# Altium PCB U_I_Meter_Bottom.PcbDoc
Units mm, origin at the board's own origin, x right, y up, seen from the top; angles counter-clockwise.
Board outline 67 x 84 mm, 2 copper layers (Top Layer, Bottom Layer), stack 1.071 mm thick; 37 components, 15 nets, 92 pads, 11 vias.
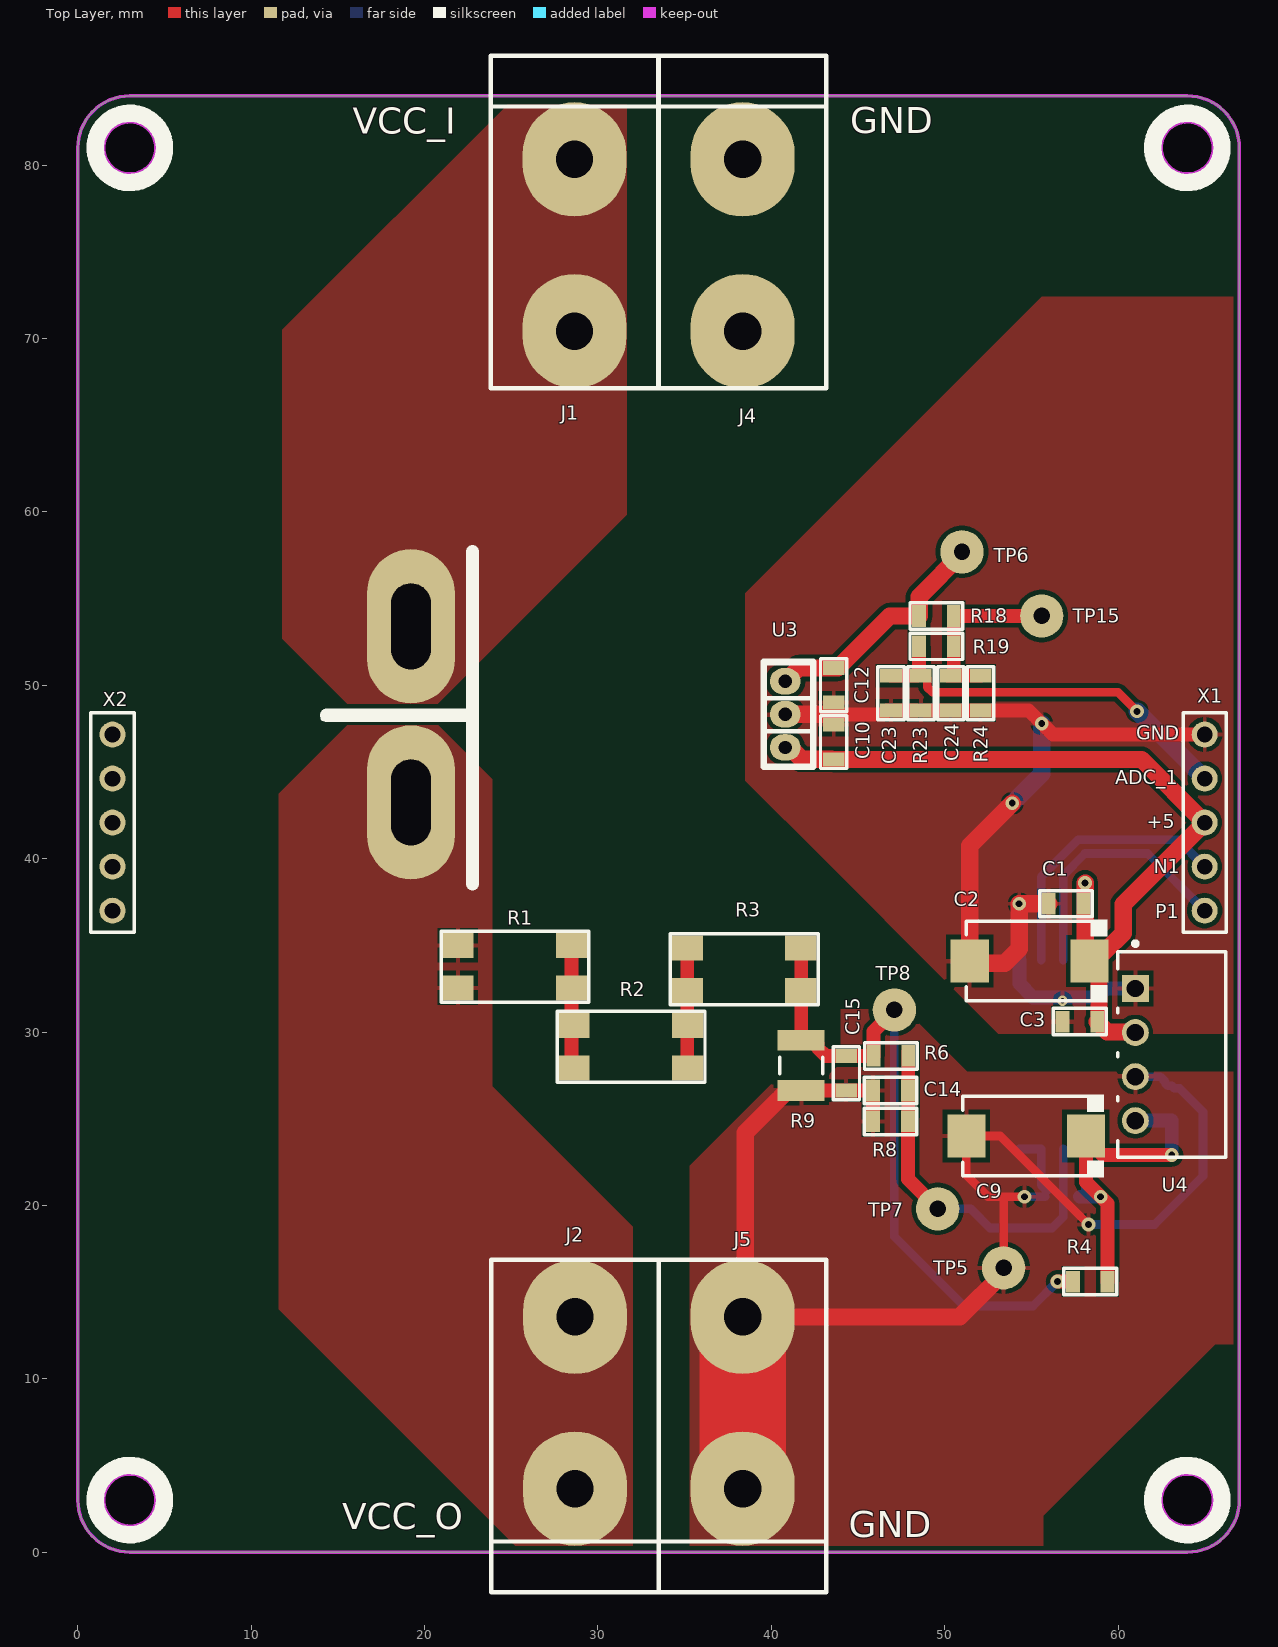
[diagram p0: Top Layer view]
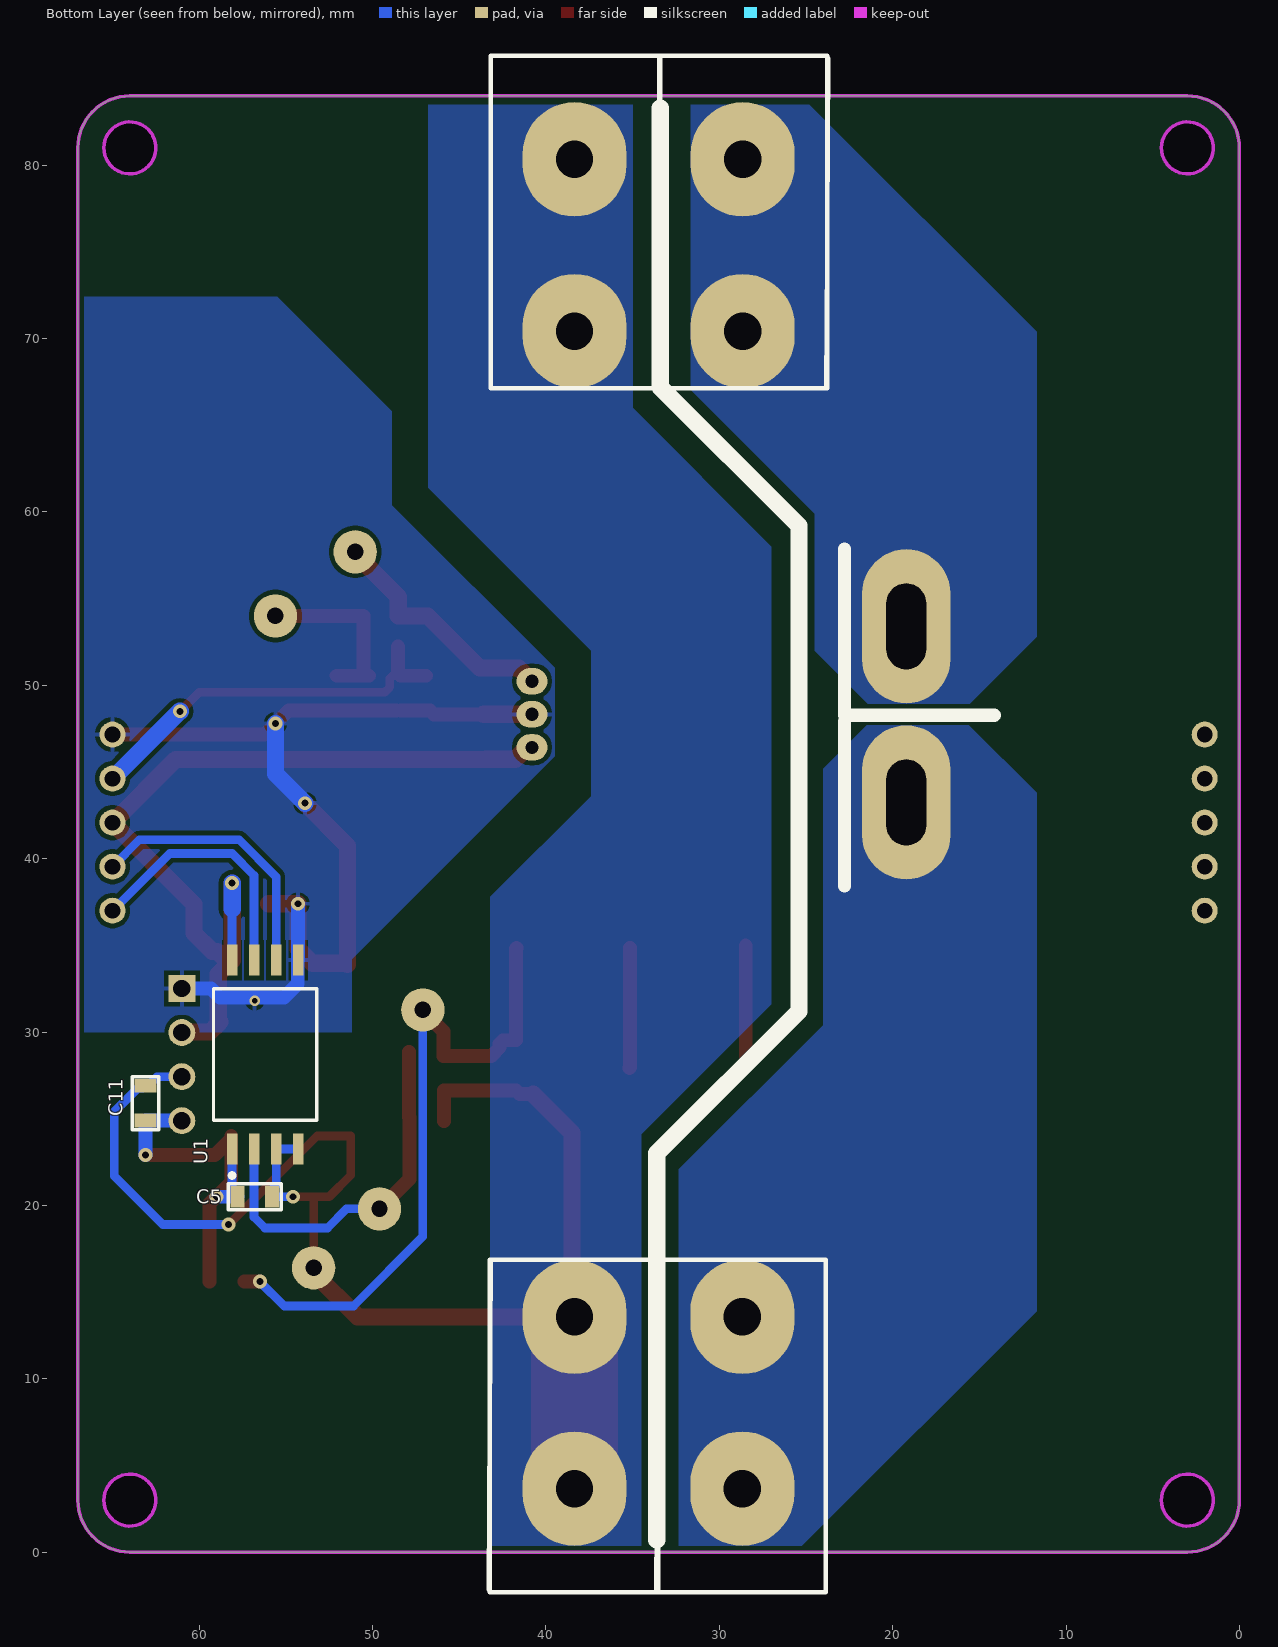
[diagram p1: Bottom Layer view, seen from below]
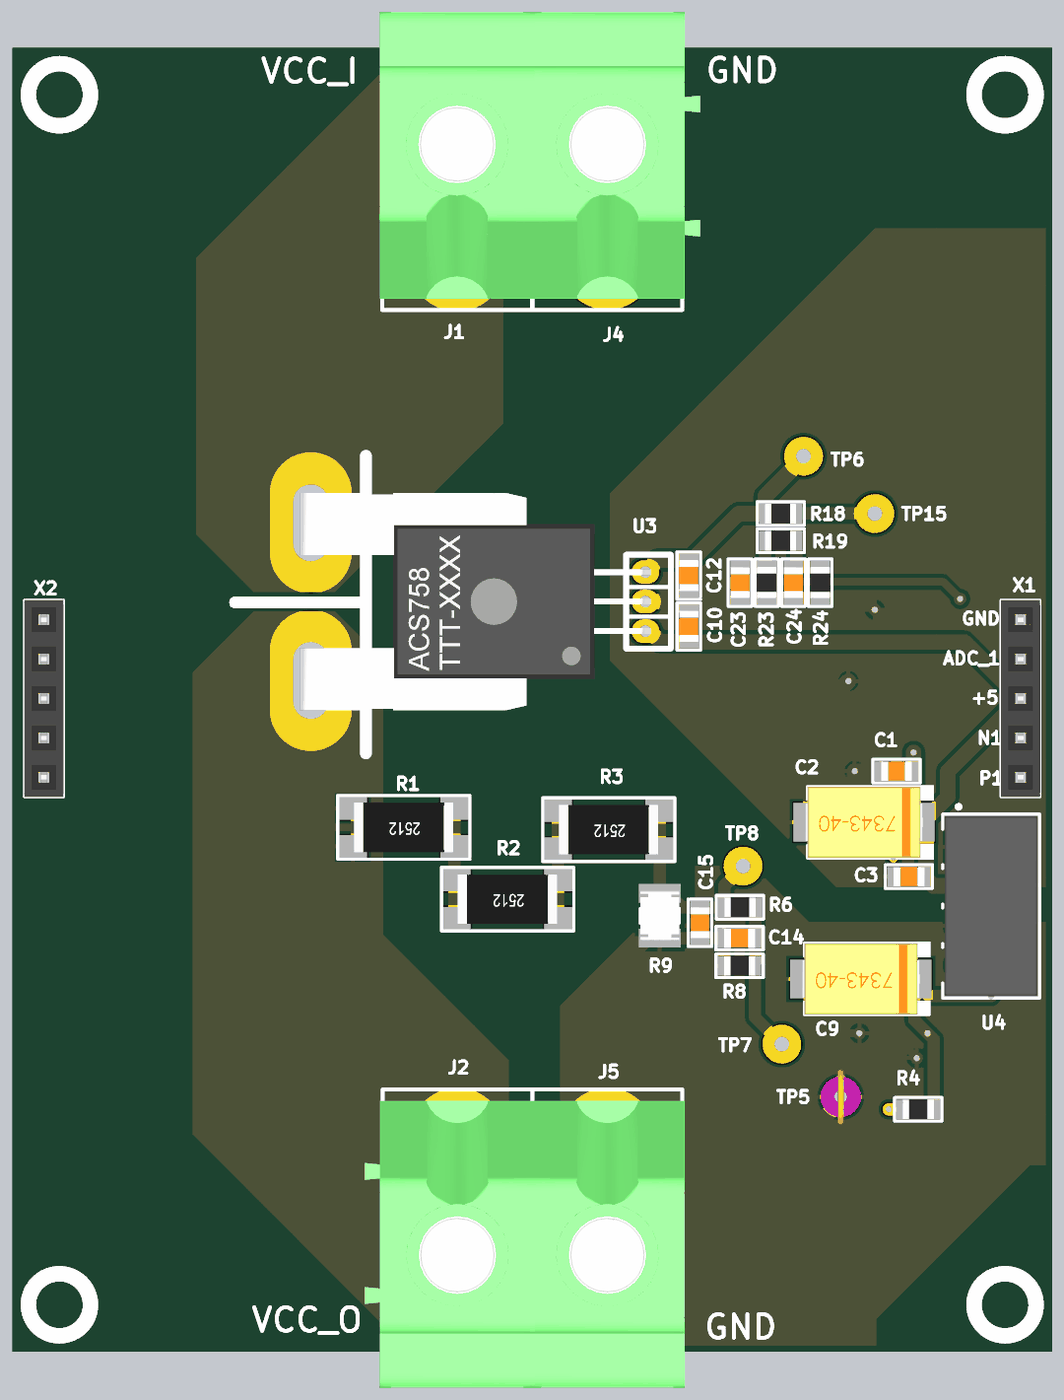
[diagram p2: 3D render of the assembled board from above, using the file's embedded part models]
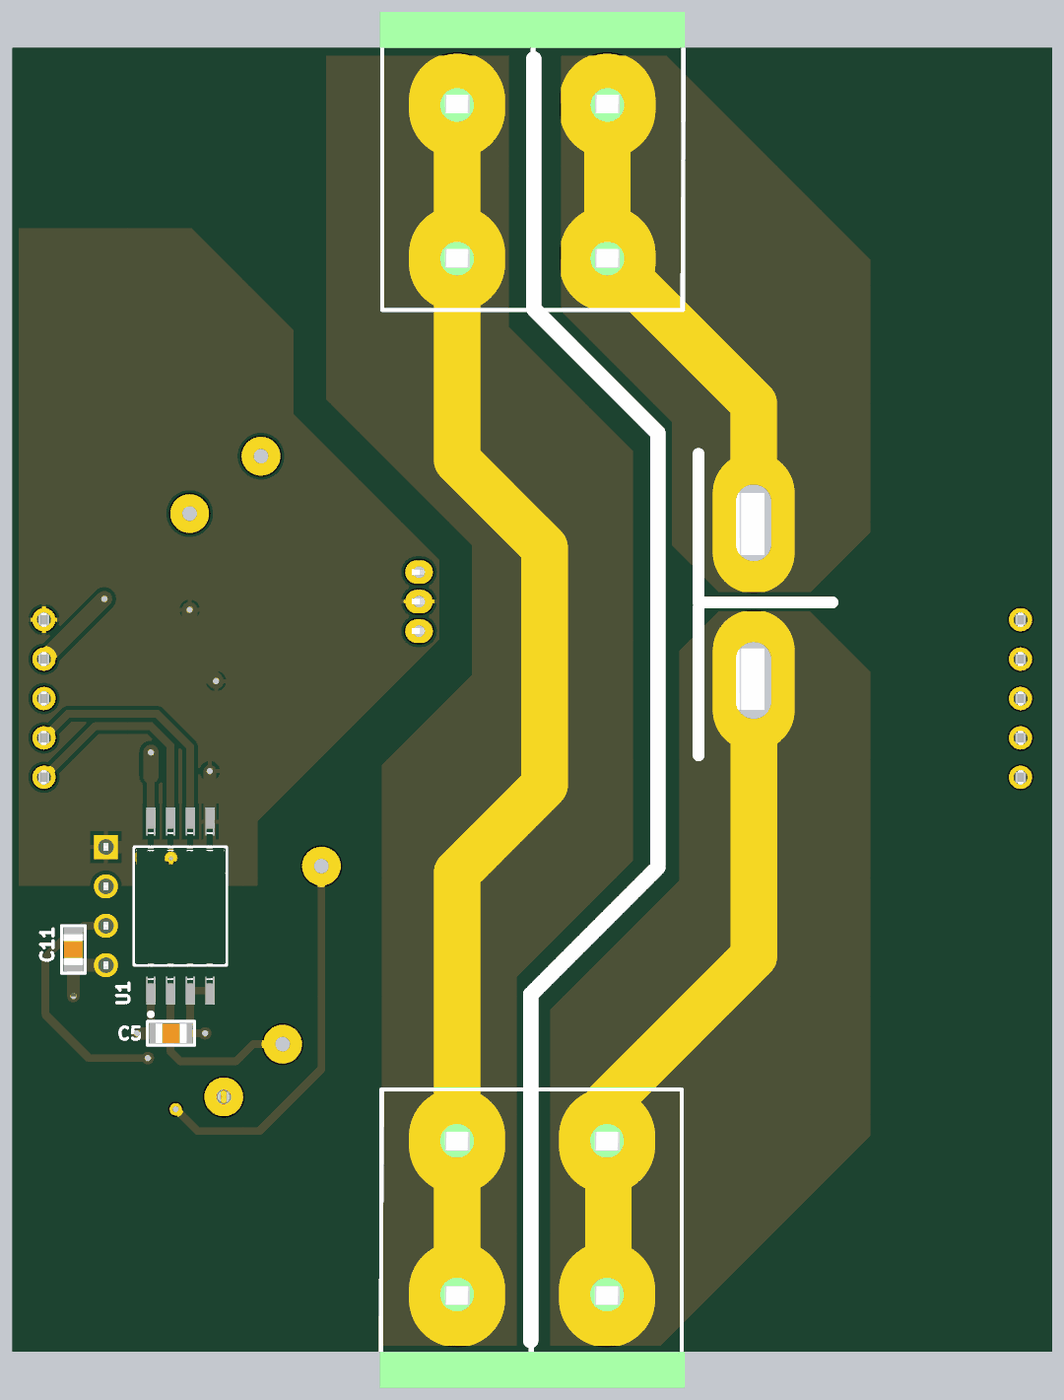
[diagram p3: 3D render of the assembled board from below, using the file's embedded part models]

## Layer stack, top to bottom
Top Solder: solder mask 0.0102, Solder Resist, Dk 3.5
Top Layer: signal copper 0.0356
Dielectric 1: dielectric 1, FR-4, Dk 4.8
Bottom Layer: signal copper 0.0356
Bottom Solder: solder mask 0.0102, Solder Resist, Dk 3.5

## Board outline
3,0 cw(c3,3) 0,3 0,81 cw(c3,81) 3,84 64,84 cw(c64,81) 67,81 67,3 cw(c64,3) 64,0
cut-out: 62.5,3 ccw(c64,3) 64,1.5 ccw(c64,3) 65.5,3 ccw(c64,3) 64,4.5 ccw(c64,3)
cut-out: 3,1.5 cw(c3,3) 1.5,3 cw(c3,3) 3,4.5 cw(c3,3) 4.5,3 cw(c3,3)
cut-out: 3,79.5 cw(c3,81) 1.5,81 cw(c3,81) 3,82.5 cw(c3,81) 4.5,81 cw(c3,81)
cut-out: 64,79.5 cw(c64,81) 62.5,81 cw(c64,81) 64,82.5 cw(c64,81) 65.5,81 cw(c64,81)

## Design rules (kind name [scope] priority, off if disabled: settings)
Clearance [All] p1: gap=0.254 ignorepadtopadclearanceinfootprint=FALSE
ComponentClearance [All] p1: gap=-1 collisioncheckmode=3 verticalgap=0 showdistances=FALSE
Height [All] p1: minheight=-1 maxheight=50 prefheight=12.7
PolygonConnect [All] p1: connectstyle=Relief reliefconductorwidth=0.254 reliefentries=4 polygonreliefangle="90 Angle" airgapwidth=0.254
RoutingVias [All] p1: holewidth=0.711 width=1.27 viastyle="Through Hole" minholewidth=0.711 minwidth=1.27 maxholewidth=0.711 maxwidth=1.27
SolderMaskExpansion [All] p1: expansion=0.102 istentingtop=FALSE
Width [All] p1: maxlimit=10 minlimit=0.254 preferedwidth=0.254 minimp=50.000000 maximp=50.000000 favimp=50.000000
28 further rules are at their usual default settings.

## Components (designator, comment, footprint, x,y, rotation, side; value= is the part's Value field where it differs from the comment)
C1 "0.1uF" CAP-0805 57,37.4 r180 top
C2 "47uF_16V" CAP-TAN-D 54.9,34.1 r180 top
C3 "0.1uF" CAP-0805 57.8,30.6 r180 top
C5 "0.1uF" CAP-0805 56.8,20.5 r0 bottom
C9 "100uF_16V" CAP-TAN-D 54.7,24 r180 top
C10 "1uF" CAP-0805 43.6,46.725 r270 top
C11 "0.1uF" CAP-0805 63.1,25.9 r90 bottom
C12 "0.1uF" CAP-0805 43.6,50 r90 top
C14 "0.33uF" CAP-0805 46.875,26.625 r0 top
C15 "0.1uF" CAP-0805 44.325,27.625 r90 top
C23 "0.47uF" CAP-0805 46.9,49.55 r90 top
C24 "220pF" CAP-0805 50.35,49.55 r90 top
J1 "MG_136_HT" Conn_MEIGAN_MG136HT 28.65,77.8 r180 top
J2 "MG_136_HT" Conn_MEIGAN_MG136HT 28.675,6.2 r0 top
J4 "MG_136_HT" Conn_MEIGAN_MG136HT 38.35,77.8 r180 top
J5 "MG_136_HT" Conn_MEIGAN_MG136HT 38.35,6.2 r0 top
R1 "" RES-2512 25.2,33.775 r180 top
R2 "" RES-2512 31.9,29.15 r180 top
R3 "" RES-2512 38.425,33.625 r180 top
R4 "" RES-0805 58.4,15.6 r0 top
R6 "1K" RES-0805 46.9,28.625 r0 top
R8 "1M" RES-0805 46.875,24.85 r0 top
R9 "RES_1210" RES_SMD_1210_IPC_B 41.725,28.075 r90 top
R18 "10K" RES-0805 49.525,54 r0 top
R19 "1K" RES-0805 49.525,52.25 r180 top
R23 "43K" RES-0805 48.625,49.55 r90 top
R24 "36K" RES-0805 52.075,49.55 r90 top
TP5 "Test_Point_PCB" Pin_Test_Point(Pink) 53.4,16.4 r0 top
TP6 "Test_Point_PCB" Test_Point 51,57.7 r0 top
TP7 "Test_Point_PCB" Test_Point 49.6,19.8 r0 top
TP8 "Test_Point_PCB" Test_Point 47.1,31.275 r0 top
TP15 "Test_Point_PCB" Test_Point 55.6,54 r90 top
U1 "AMC1311" FP-DWV0008A-MFG 56.2,28.7 r90 bottom
U3 "ACS758" ACS758-100 31.025,48.325 r90 top
U4 "B0505S-1W" B0505S-1W 63.1,28.7 r270 top locked
X1 "CONN-5-PIN" CONN-PLS-5-2.54mm 65,37 r90 top locked
X2 "CONN-5-PIN" CONN-PLS-5-2.54mm 2,37 r90 top locked

## Footprints (in the part's own frame and the unit in brackets; to place one, negate y for a bottom-side part, rotate by r counter-clockwise, add the part's x,y. Pads: shape width x height; smd on the part's side, far side on the other; paste and mask are expansions set on the pad)
ACS758-100 [mil]
  oval 60x70 hole 30: 1(-75,-385) 2(0,-385) 3(75,-385)
  oval 350x200 hole 90 slot 195 at 0 deg: 4(200,465) 5(-200,465)
  silkscreen extent -385,-449 370,665, body extent -276,-404 276,492, height 280
B0505S-1W [mm]
  rect 1.55x1.55 hole 1 paste-2539.97 mask+0: 1(-3.81,-2.1)
  round 1.55 hole 1 paste-2539.97 mask+0: 2(-1.27,-2.1) 3(1.27,-2.1) 4(3.81,-2.1)
  silkscreen extent -6.52,-3.13 5.92,3.13, body extent -6.02,-3.22 6.02,3.22, height 0.25
CAP-0805 [mm]
  rect 0.8x1.25 smd mask+0.015: 1(-1,0) 2(1,0)
  silkscreen extent -1.52,-0.76 1.52,0.76, body extent -1,-0.62 1,0.63, height 0.8
CAP-TAN-D [mm]
  rect 2.2x2.5 smd: 1(-3.45,0) 2(3.45,0)
  silkscreen extent -4.5,-2.4 3.65,2.4, body extent -3.8,-2.3 3.8,2.3, height 4
CONN-PLS-5-2.54mm [mm]
  round 1.5 hole 0.9: 1(0,0) 2(2.54,0) 3(5.08,0) 4(7.62,0) 5(10.16,0)
  silkscreen extent -1.25,-1.25 11.41,1.25, body extent -1.27,-1.27 11.43,1.27, height 8.4
Conn_MEIGAN_MG136HT [mm]
  oval 6x6.6 hole 2.159: 1(0,7.366) 1(0,-2.54)
  silkscreen extent -4.83,-8.51 4.83,10.67, body extent -6,-8.55 5,9.95, height 30.95
FP-DWV0008A-MFG [mm]
  rect 1.8x0.6 smd paste+0 mask+0: 1(-5.45,1.905) 2(-5.45,0.635) 3(-5.45,-0.635) 4(-5.45,-1.905) 5(5.45,-1.905) 6(5.45,-0.635) 7(5.45,0.635) 8(5.45,1.905)
  silkscreen extent -7.1,-2.98 3.8,2.98, body extent -5.75,-2.93 5.75,2.93, height 2.8
Pin_Test_Point(Pink) [mm]
  round 2.5 hole 0.95: 1(0,0)
  body extent -1.3,-1.78 1.3,1.78, height 6.93
RES-0805 [mm]
  rect 0.8x1.25 smd mask+0.015: 1(-1,0) 2(1,0)
  silkscreen extent -1.52,-0.76 1.52,0.76, body extent -1,-0.62 1,0.63, height 0.6
RES-2512 [mm]
  rect 1.8x1.45 smd: 1(-3.275,-1.225) 1(-3.275,1.225) 2(3.275,-1.225) 2(3.275,1.225)
  silkscreen extent -4.28,-2.05 4.25,2.05, body extent -3.2,-1.6 3.2,1.6, height 0.6
RES_SMD_1210_IPC_B [mm]
  rect 1.205x2.706 smd paste+0 mask+0: 1(-1.451,0) 2(1.451,0)
  silkscreen extent -0.47,-1.25 0.47,1.25, body extent -2.3,-1.6 2.3,1.6, height 0.25
Test_Point [mm]
  round 2.5 hole 0.95: 1(0,0)

## Part data
C1 C3 C5 C10 C11 C12 C14 C15 C23 C24: library part CAP-NON-POLAR
C2: library part CAP-POLAR
C9: library part CAP_POL_SMD
J1 J2 J4 J5: library part Connector_MEIGAN_MG136HT
R1 R2 R3 R4 R6 R8 R18 R23 R24: library part RES-CONST
R19: library part RES-CONST, "10K"
TP5 TP6 TP7 TP8 TP15: library part TP_PCB?, "Test_Point"

## Via types
v1: diameter 0.8, hole 0.4, Top Layer to Bottom Layer, tented both sides, 9 vias
v2: diameter 0.6, hole 0.3, Top Layer to Bottom Layer, 1 vias
v3: diameter 0.8, hole 0.4, Top Layer to Bottom Layer, 1 vias

## Nets (pads, with @x,y where several pads share a name; then routed paths per layer and width w, separated by ;. In a path a pad name is that pad's centre, name@x,y a point inside that pad or via, vN(x,y) a via of type N, cw(c..) or ccw(c..) an arc to the next point about the centre after c; other vN are vias at no path point)
+5: C1.1 C2.1 C3.1 C10.2 U1.8 U3.1 U4.2 X1.3 | length 52.3
  Top Layer w1: U3.1 41.071,46.42 41.759,45.732 C10.2@43.475,45.732 ; C10.2 61.355,45.725 X1.3 60.3,37.38 60.3,35.7 59.25,34.65 58.95,34.65 58.35,34.05 C2.1@58.35,33.9 ; v1(58.1,38.6) 58.1,37.4 58.1,34.15 C2.1@58.35,33.9 ; C3.1 58.9,30.5 58.9,30.475 59.375,30 60.97,30 U4.2 ; C3.1@58.9,30.6 58.9,33.35 C2.1@58.35,33.9
  Bottom Layer w0.5: 58.1,37.1 58.105,37.095 U1.8
  Bottom Layer w1: 58.1,37.1 v1(58.1,38.6) ; U4.2@60.93,29.9 U4.2
GND: C5.1 C9.2 C11.2 C14.1 C15.1 J4.1 J5.1 R8.1 R9.1 TP5.1 U1.3 U1.4 U4.3 | length 85
  Top Layer w0.5: TP5.1@53.4,16.1 TP5.1 ; TP5.1@53.4,16.7 53.4,20.5 ; v1(54.6,20.5) 53.4,20.5 ; v1(58.3,18.9) 53.2,24 C9.2 51.25,21.75 52.5,20.5 53.4,20.5
  Top Layer w0.8: J5.1@38.35,16.131 J5.1@38.5,16.281 ; R9.1@40.722,26.422 41.523,26.422 R9.1 C14.1 R8.1
  Top Layer w1: J5.1@38.35,13.566 50.866,13.566 TP5.1@53.4,16.1 ; J5.1@38.5,16.281 38.5,24.2 R9.1@40.722,26.422
  Top Layer w5: J5.1@38.35,3.66 J5.1@38.35,13.566
  Bottom Layer w0.5: U1.4 U1.3 55.565,21.168 55.858,20.875 C5.1@55.95,20.875 ; v1(54.6,20.5) C5.1 ; v1(58.3,18.9) 62.1,18.9 64.9,21.7 64.9,25.4 63.55,26.75 63.25,26.75 C11.2 62.875,26.9 62.725,27.05 62.725,27.137 62.432,27.43 U4.3
GND_III: C1.2 C2.2 C3.2 C10.1 C12.1 C23.1 C24.1 R23.1 R24.1 U1.5 U3.2 U4.1 X1.5 | length 59.6
  Top Layer w0.8: 43.6,48.325 46.45,48.325 46.675,48.55 R23.1@48.35,48.55 ; R23.1 C24.1 R24.1 54.85,48.55 56.24,47.16 X1.5
  Top Layer w1: U3.2 43.6,48.325 ; v1(53.9,43.2) 51.45,40.75 51.45,33.9 51.514,33.964 53.464,33.964 54.3,34.8 v1(54.3,37.4) C1.2
  Bottom Layer w0.8: v1(54.3,37.4) 54.295,37.395 U1.5 54.312,34.133 54.312,32.788 55.1,32 58.8,32 59.31,32.51 U4.1
  Bottom Layer w1: v1(53.9,43.2) 55.6,44.9 v1(55.6,47.8)
  other v2: 56.8,31.8
NetC12_2: C12.2 R18.1 TP6.1 U3.3 | length 14.1
  Top Layer w1: U3.3 41.574,51 C12.2 43.825,51 46.825,54 R18.1 48.525,55.113 TP6.1@51.113,57.7
NetC14_2: C14.2 R6.2 R8.2 TP7.1 U1.2 | length 21.4
  Top Layer w0.8: R8.2 47.875,21.525 TP7.1 ; R8.2@47.875,25.075 47.9,25.1 47.9,26.625 R6.2 R6.2@47.9,28.85
  Bottom Layer w0.5: TP7.1 51.5,19.8 52.6,18.7 56.2,18.7 56.835,19.335 U1.2
NetC15_2: C15.2 R3.1 R4.1 R6.1 R9.2 TP8.1 | length 38.8
  Top Layer w0.8: R3.1@41.7,34.85 41.725,34.825 R9.2 42.476,29.526 42.678,29.323 42.678,29.094 43.147,28.625 C15.2 R6.1 45.9,30.021 47.1,31.221 TP8.1 ; v3(56.5,15.6) R4.1
  Bottom Layer w0.5: TP8.1 47.1,18.2 51.1,14.2 55.1,14.2 v3(56.5,15.6)
NetC23_2: C23.2 R19.2 R23.2 X1.4 | length 22.3
  Top Layer w0.5: R23.2@48.4,50.55 48.85,50.55 49,50.4 49,49.893 49.293,49.6 60,49.6 v1(61.1,48.5)
  Top Layer w0.8: C23.2 R23.2@48.4,50.55 ; R23.2@48.525,50.85 R19.2
  Bottom Layer w1: v1(61.1,48.5) 61.12,48.5 X1.4
NetC24_2: C24.2 R18.2 R19.1 R24.2 TP15.1 | length 10.5
  Top Layer w0.8: C24.2@50.189,50.55 C24.2 C24.2@50.375,50.55 ; R24.2 C24.2@50.375,50.55 ; TP15.1 R18.2 R19.1 50.525,50.7 C24.2@50.375,50.55
NetJ1_1: J1.1 U3.4
NetJ2_1: J2.1 R1.2 U3.5
NetR1_1: R1.1 R2.2 | length 7.1
  Top Layer w0.8: R1.1@28.475,35 28.475,32.55 28.475,28.075 R2.2@28.625,27.925
NetR2_1: R2.1 R3.2 | length 6.9
  Top Layer w0.8: R3.2@35.15,34.85 35.15,32.4 35.15,27.95 R2.1@35.175,27.925
NetU1_6: U1.6 X1.2 | length 15.8
  Bottom Layer w0.5: U1.6 55.565,38.965 57.7,41.1 63.44,41.1 X1.2
NetU1_7: U1.7 X1.1 | length 14.9
  Bottom Layer w0.5: U1.7 56.835,39.035 58.1,40.3 61.7,40.3 X1.1
VCC_ISO: C5.2 C9.1 C11.1 R4.2 U1.1 U4.4 | length 22.2
  Top Layer w0.8: C9.1 C9.1@58.15,23.85 ; R4.2 59.4,20.1 58.15,21.35 C9.1@58.15,23.85 ; v1(63.1,22.9) 59.1,22.9 C9.1@58.15,23.85
  Bottom Layer w0.5: C5.2@58.105,20.515 U1.1
  Bottom Layer w0.8: C5.2 v1(59,20.5) ; U4.4@61.054,24.89 62.865,24.89 62.875,24.9 C11.1 v1(63.1,22.9)
pads on no net: X2.1 X2.2 X2.3 X2.4 X2.5

## Polygon pours and split planes (outlines as drawn)
GND on Top Layer "NONET_L-01_P-001" (solid, pour order 8): 51.3,27.7 47.7,31.3 44,31.3 44,28.2 43,27.2 40.2,27.2 35.3,22.3 35.3,0 55.7,0 55.7,2.1 65.6,12 67,12 67,27.7
GND_III on Top Layer "NONET_L-01_P-001" (solid, pour order 6): 67,72.4 55.6,72.4 38.5,55.3 38.5,44.5 43.1,39.9 53.1,29.9 67,29.9
NetJ1_1 on Top Layer "NONET_L-01_P-001" (solid, pour order 5): 15.55,48.95 11.8,52.7 11.8,70.5 24.8,83.5 31.65,83.5 31.65,59.85 20.75,48.95
NetJ2_1 on Top Layer "NONET_L-01_P-001" (solid, pour order 3): 18.9,47.7 15.55,47.7 11.6,43.75 11.6,14 25.3,0.3 32,0.3 32,18.775 23.9,26.875 23.9,44.575 20.775,47.7
NetJ1_1 on Bottom Layer "NONET_L-01_P-001" (solid, pour order 0): 15.55,48.95 11.7,52.8 11.7,70.4 24.8,83.5 31.65,83.5 31.65,67.05 24.494,59.894 24.494,51.994 21.45,48.95
NetJ2_1 on Bottom Layer "NONET_L-01_P-001" (solid, pour order 1): 19.225,47.7 15.6,47.7 11.7,43.8 11.7,13.9 25.3,0.3 32.325,0.3 32.325,22.075 24,30.4 24,45.2 21.5,47.7
GND_III on Bottom Layer "NONET_L-01_P-001" (solid, pour order 7): 67,72.4 55.5,72.4 48.9,65.8 48.9,60.4 39.5,51 39.5,45.9 51.2,34.2 51.2,30 67,30
GND on Bottom Layer "NONET_L-01_P-001" (solid, pour order 4): 35,83.5 35,66 27,58 27,31.6 34.5,24.1 34.5,0.3 43.2,0.3 43.2,37.8 37.4,43.6 37.4,52 46.8,61.4 46.8,83.5

## Keep-outs
Keep-Out Layer:
  circle w0.2: c3,3 r1.5
  circle w0.2: c64,3 r1.5
  circle w0.2: c64,81 r1.5
  circle w0.2: c3,81 r1.5
  lines w0.2: 0,3 ccw(c3,3) 3,0 64,0 ccw(c64,3) 67,3 67,81 ccw(c64,81) 64,84 3,84 ccw(c3,81) 0,81 0,3

## Silkscreen, mask and mechanical layers (free items; w line width, h text height)
Top Overlay:
  circle w1: c64,81 r2
  circle w1: c3,81 r2
  circle w1: c3,3 r2
  circle w1: c64,3 r2
  text "GND" at 44.554,81.854 h1.52
  text "VCC_I" at 15.854,81.808 h1.52
  text "GND" at 61.054,46.854 h0.8
  text "ADC_1" at 59.854,44.287 h0.8
  text "+5" at 61.654,41.754 h0.8
  text "N1" at 62.054,39.154 h0.8
  text "P1" at 62.154,36.554 h0.8
  text "VCC_O" at 15.254,1.308 h1.52
  text "GND" at 44.454,0.854 h1.52
Bottom Overlay:
  lines w1: 33.4,83.3 33.4,67.2 25.4,59.2 25.4,31.2 33.6,23 33.6,0.7
Bottom Solder:
  lines w3: 19.2,42.8 19.2,25.481 28.6,16.081 28.6,6 ; 19.214,53.405 19.214,61.114 28.534,70.434 28.65,70.434 28.65,77.715 ; 38.35,6.225 38.35,30.85 32.7,36.5 32.7,51.8 38.35,57.45 38.35,77.7